# Altium PCB Alimentação v3.PcbDoc
Units mm, origin at the board's own origin, x right, y up, seen from the top; angles counter-clockwise.
Board outline 65.66 x 46.74 mm, 2 copper layers (Top Layer, Bottom Layer); 13 components, 8 nets, 26 pads, 0 vias.
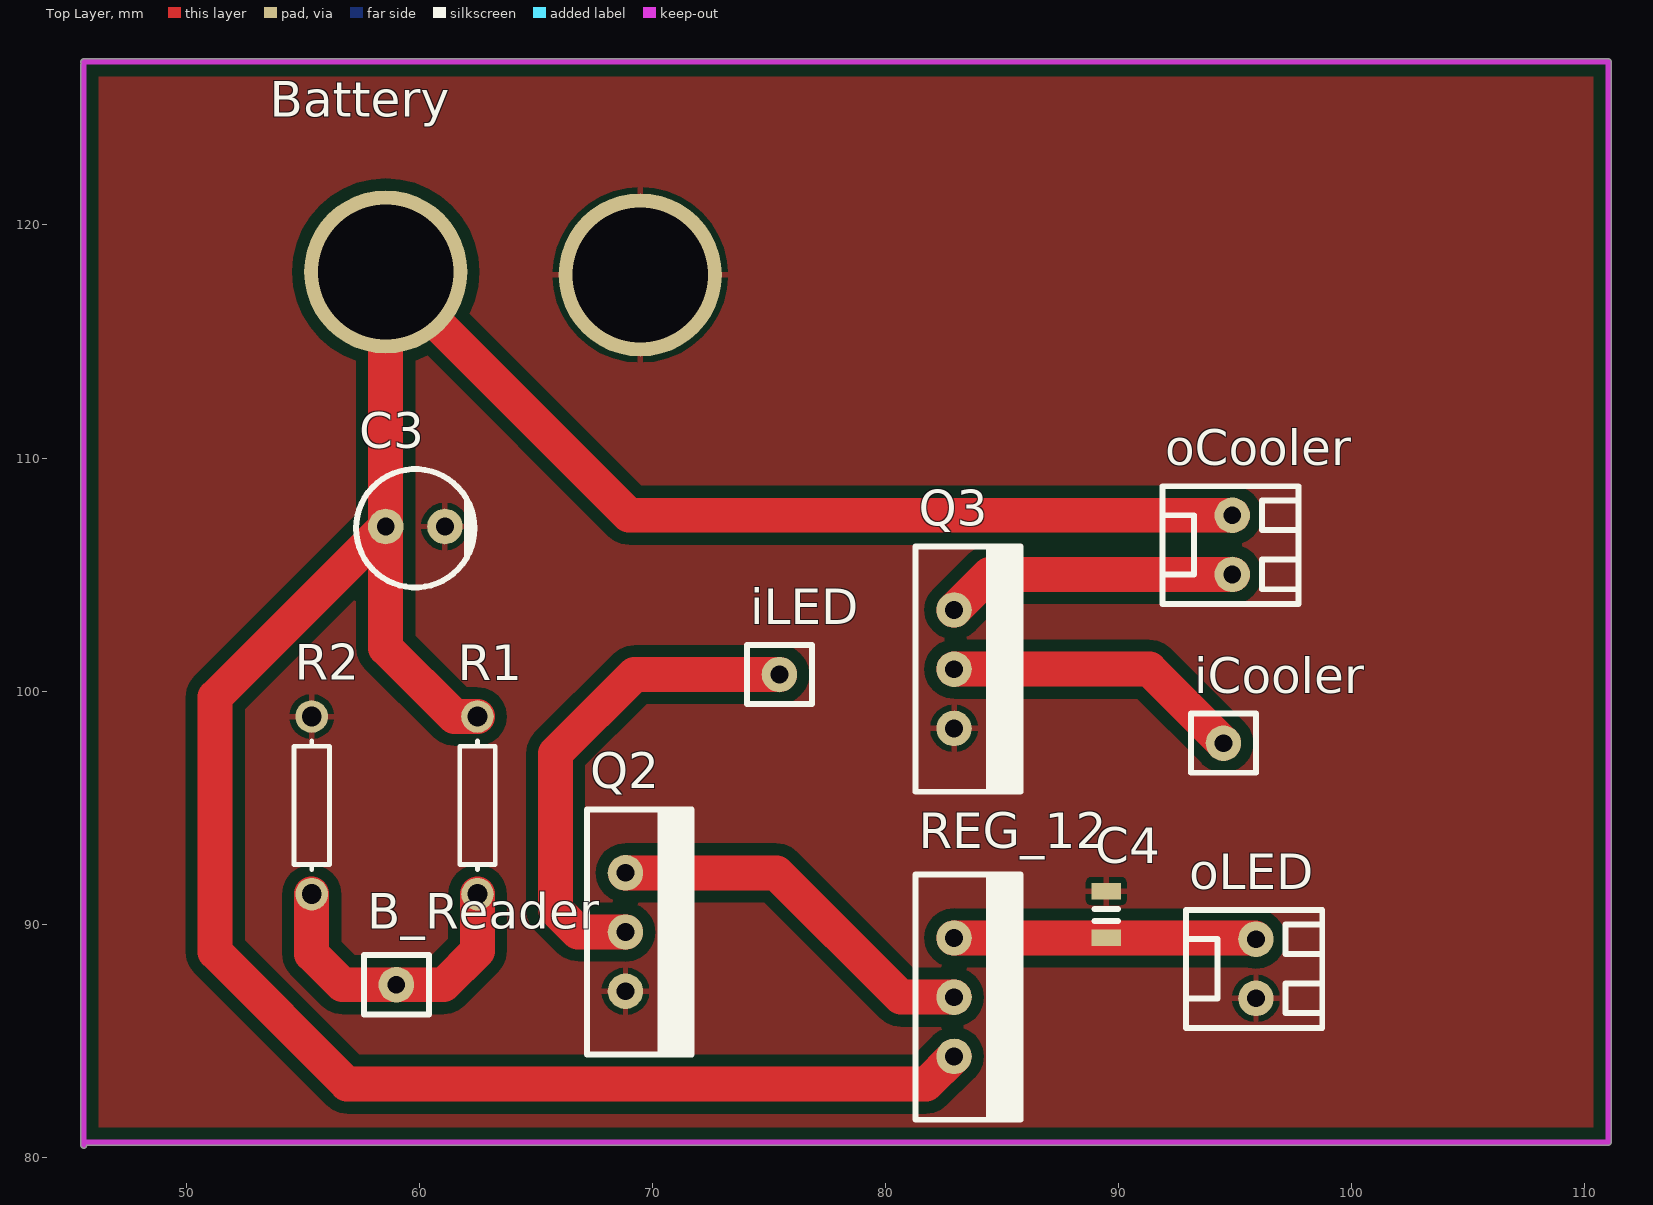
[diagram p0: Top Layer view]
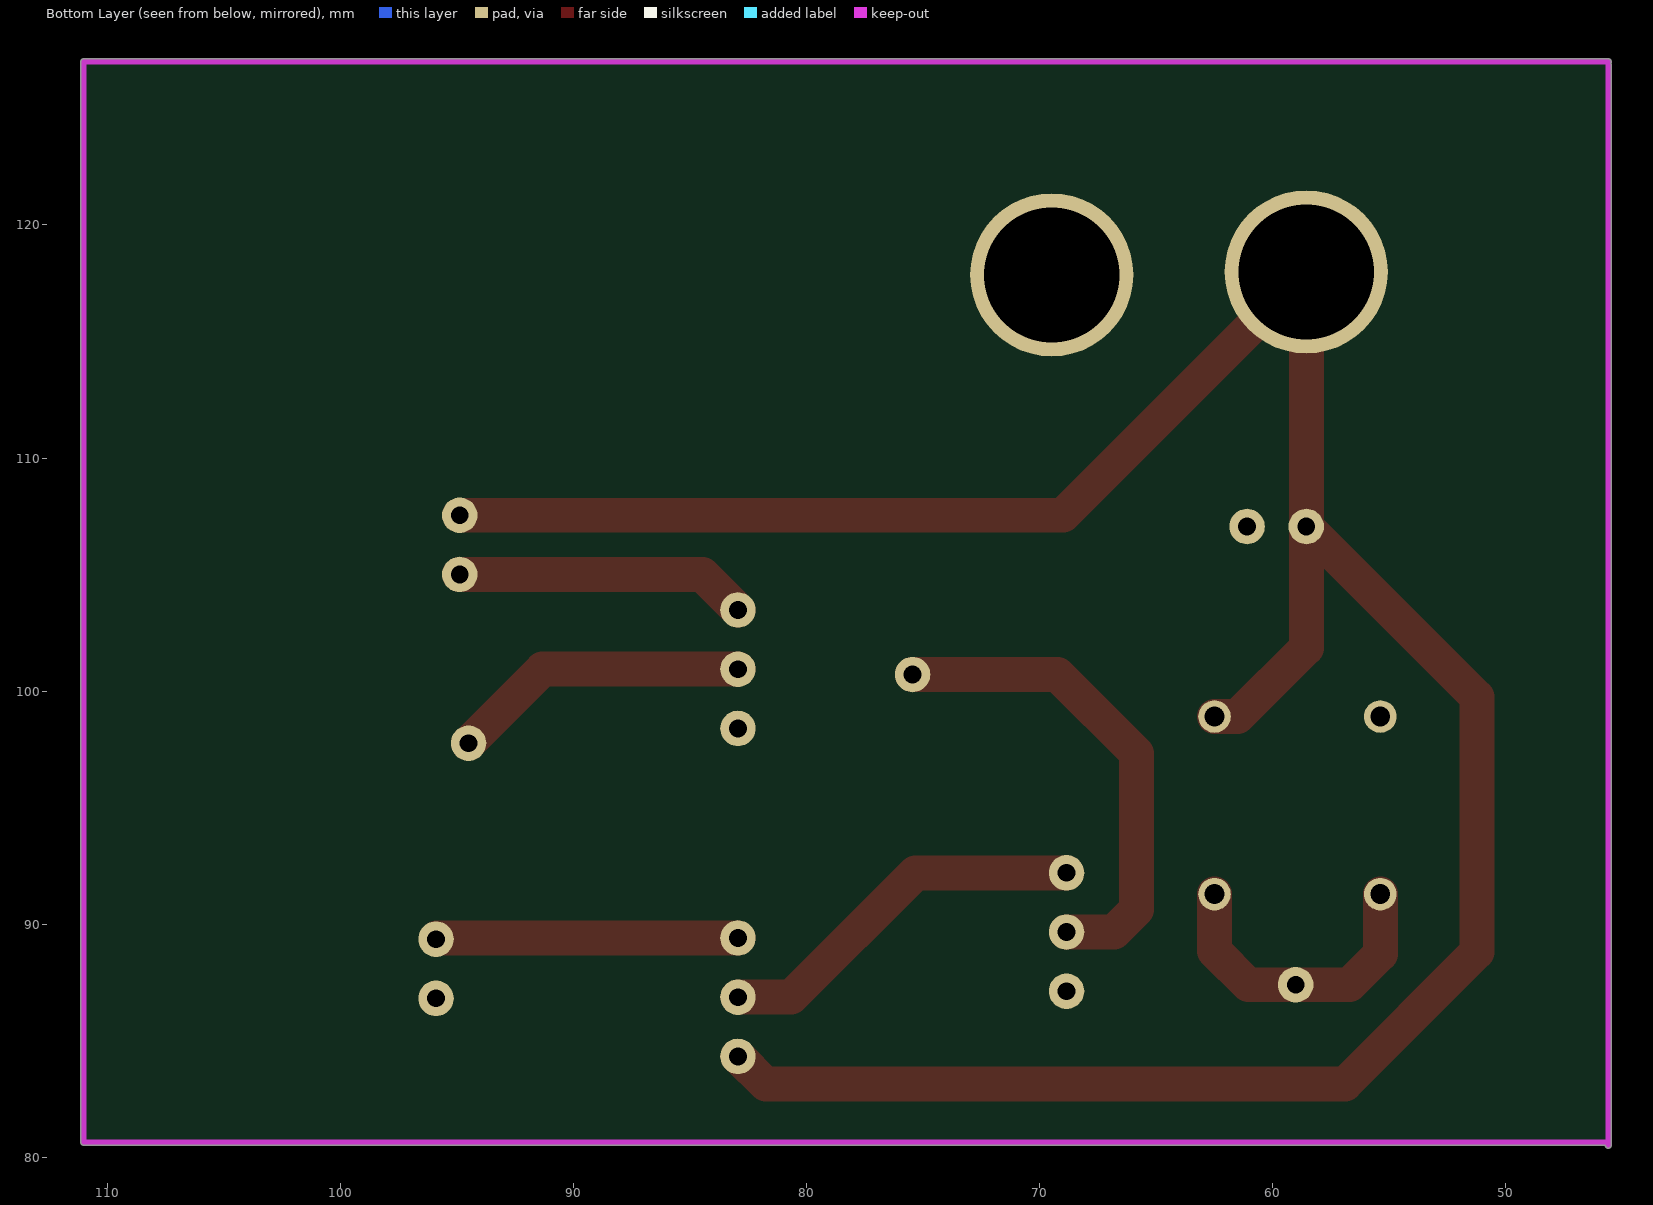
[diagram p1: Bottom Layer view, seen from below]
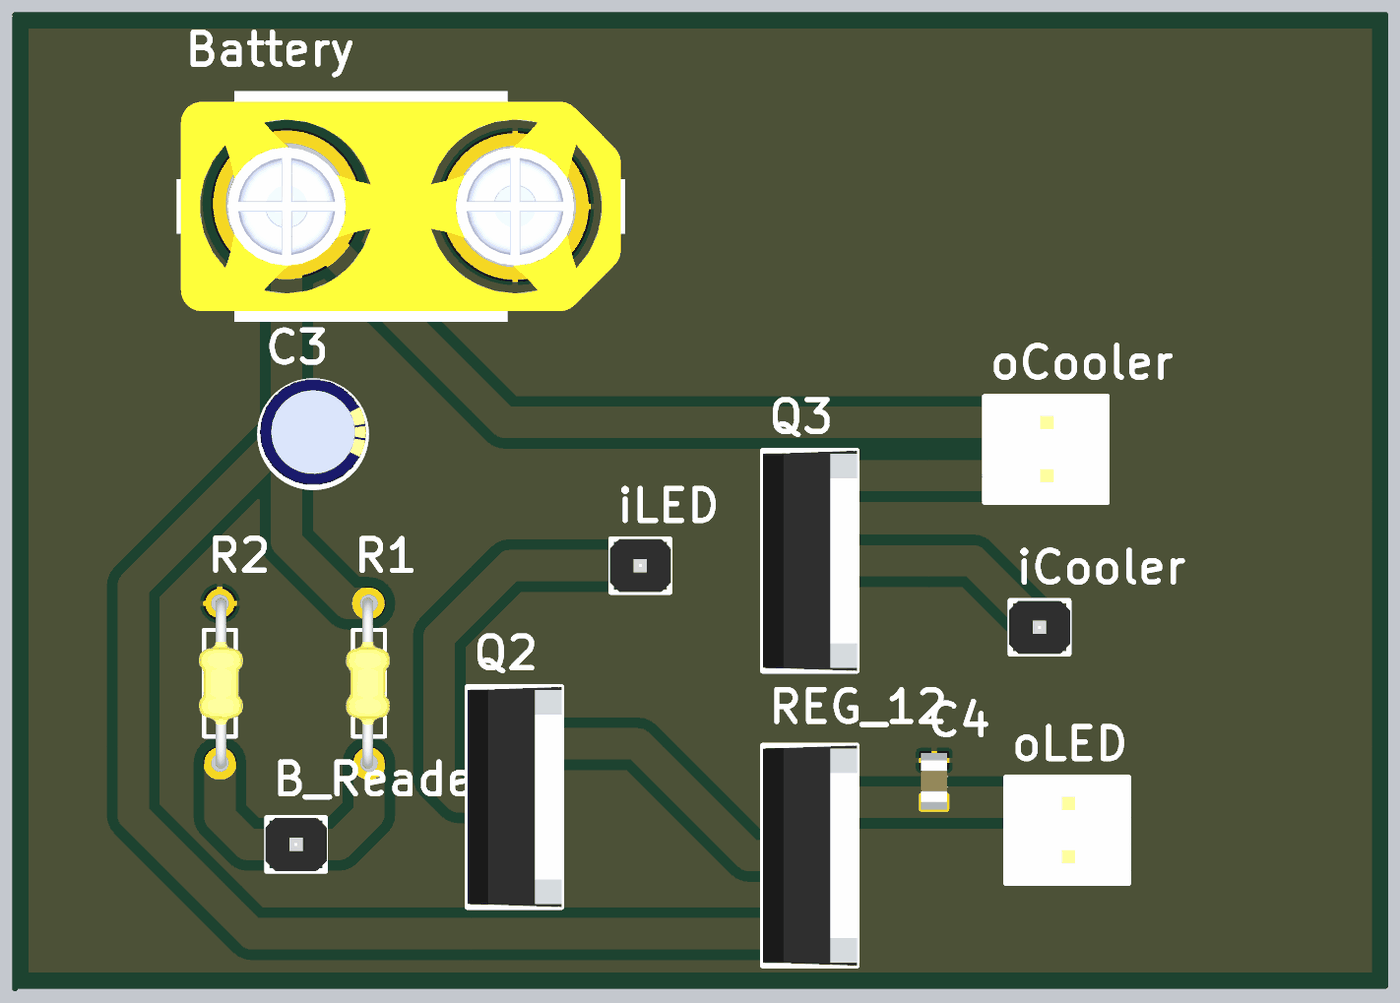
[diagram p2: 3D render of the assembled board from above, using the file's embedded part models]

## Layer stack, top to bottom
Top Solder: solder mask 0.0102, Solder Resist, Dk 3.5
Top Layer: signal copper 0.0356
Dielectric 1: dielectric 0.32, FR-4, Dk 4.8
Bottom Layer: signal copper 0.0356
Bottom Solder: solder mask 0.0102, Solder Resist, Dk 3.5

## Board outline
45.466,80.518 45.466,126.873 cw(c45.593,126.873) 45.483,126.936 cw(c45.593,127) 45.593,127.127 110.998,127.127 cw(c110.998,127) 111.125,127 111.125,80.645 cw(c110.998,80.645) 110.998,80.518 45.72,80.518 cw(c45.593,80.518)

## Design rules (kind name [scope] priority, off if disabled: settings)
Clearance [All] p1: gap=0.5 ignorepadtopadclearanceinfootprint=FALSE except(0: Arc-Hole Track-Hole SMDPad-Hole THPad-Hole Via-Hole Fill-Hole Poly-Hole Region-Hole Text-Hole)
PolygonConnect [All] p1: connectstyle=Relief reliefconductorwidth=0.254 reliefentries=4 polygonreliefangle="90 Angle" airgapwidth=0.254
RoutingVias [All] p1: holewidth=0.711 width=1.27 viastyle="Through Hole" minholewidth=0.711 minwidth=1.27 maxholewidth=0.711 maxwidth=1.27
SolderMaskExpansion [All] p1: expansion=0.102
Width [All] p1: maxlimit=1.5 minlimit=0.254 preferedwidth=1.5
30 further rules are at their usual default settings.

## Components (designator, comment, footprint, x,y, rotation, side; value= is the part's Value field where it differs from the comment)
B_Reader "*" "HEADER 1X1 8.5MM" 59.004,87.401 r90 top
Battery "*" XT90 58.547,117.983 r0 top
C3 "*" "Eletrolytic Capacitor 5x5mm" 58.547,107.061 r0 top
C4 "*" "SMD Capacitor" 89.459,91.415 r0 top
iCooler "*" "HEADER 1X1 8.5MM" 94.488,97.765 r90 top
iLED "*" "HEADER 1X1 8.5MM" 75.438,100.711 r90 top
oCooler "*" KK2 94.869,105.004 r90 top
oLED "*" KK2 95.885,86.817 r90 top
Q2 "Mosfet N" TO-220 68.834,87.122 r90 top
Q3 "Mosfet N" TO-220 82.931,98.4 r90 top
R1 "Resistor THT" "RESISTOR THT 5mm" 62.484,95.098 r90 top value=330K
R2 "Resistor THT" "RESISTOR THT 5mm" 55.372,95.098 r270 top value=90K
REG_12 "78XX TO-220" TO-220 82.931,84.328 r90 top

## Footprints (in the part's own frame and the unit in brackets; to place one, negate y for a bottom-side part, rotate by r counter-clockwise, add the part's x,y. Pads: shape width x height; smd on the part's side, far side on the other; paste and mask are expansions set on the pad)
"Eletrolytic Capacitor 5x5mm" [mil]
  round 60 hole 30: 1(0,0) 2(100,0)
  silkscreen extent -50,-103 150,97, body extent -50,-99 150,101, height 520
"HEADER 1X1 8.5MM" [mil] "Stackable 1 pin header"
  round 60 hole 30: 1(0,0)
  silkscreen extent -50,-55 50,55, body extent -50,-57 50,57, height 335
KK2 [mil] "KK Conector, 2 ways"
  round 60 hole 30: 1(0,0) 2(100,0)
  silkscreen extent -50,-112 149,118, body extent -50,-116 150,114, height 468
"RESISTOR THT 5mm" [mm]
  round 1.4 hole 0.85: 1(-3.81,0) 2(3.81,0)
  silkscreen extent -2.77,-0.76 2.77,0.76, body extent -4.07,-1 4.07,1.1, height 2.55
"SMD Capacitor" [mm]
  rect 1.25x0.7 smd: 1(0,0) 2(0,-2)
  silkscreen extent -0.51,-1.27 0.51,-0.76, body extent -0.63,-1.99 0.62,0.01, height 1
TO-220 [mil] "TO-220 coupling"
  round 60 hole 30: 1(0,0) 2(100,0) 3(200,0)
  silkscreen extent -107,-112 307,65, body extent -107,-112 307,65, height 810
XT90 [mm]
  round 7 hole 5.8 mask+0.102: 1(0,0)
  round 7 hole 5.8: 2(10.922,-0.127)
  body extent -5.24,-5.63 16.16,5.37, height 20.7

## Part data
B_Reader iCooler iLED: library part "Male Pin Head 1x1"
Battery: library part XT90
C3: library part "Electrolytic Capacitor 0.33uF"
C4: library part "Capacitor SMD 0805"
oCooler oLED: library part KK2, "KK Connector, 2 ways"
Q2 Q3: Model=IRF3205

## Nets (pads, with @x,y where several pads share a name; then routed paths per layer and width w, separated by ;. In a path a pad name is that pad's centre, name@x,y a point inside that pad or via, vN(x,y) a via of type N, cw(c..) or ccw(c..) an arc to the next point about the centre after c; other vN are vias at no path point)
B_Reader: B_Reader.1 R1.1 R2.2 | length 13.3
  Top Layer w1.5: R2.2 55.372,88.722 56.693,87.401 B_Reader.1 61.036,87.401 62.484,88.849 R1.1
C_Cooler: iCooler.1 Q3.2 | length 12.9
  Top Layer w1.5: Q3.2 91.313,100.94 iCooler.1
C_LED: iLED.1 Q2.2 | length 21.1
  Top Layer w1.5: Q2.2 66.802,89.662 65.837,90.627 65.837,97.333 69.215,100.711 iLED.1
C_out: oCooler.1 Q3.3 | length 12.6
  Top Layer w1.5: Q3.3 84.455,105.004 oCooler.1
GND: Battery.2 C3.2 C4.1 oLED.1 Q2.1 Q3.1 R2.1
LED: C4.2 oLED.2 REG_12.3 | length 12.9
  Top Layer w1.5: REG_12.3 oLED.2@95.834,89.408
NetQ2_3: Q2.3 REG_12.2 | length 16.3
  Top Layer w1.5: Q2.3 75.311,92.202 80.645,86.868 REG_12.2
VCC: Battery.1 C3.1 oCooler.2 R1.2 REG_12.1 | length 117.8
  Top Layer w1.5: R1.2 61.493,98.908 58.547,101.854 C3.1 ; REG_12.1 81.737,83.134 56.896,83.134 51.232,88.798 51.232,99.746 C3.1 ; oCooler.2 68.986,107.544 Battery.1 C3.1

## Polygon pours and split planes (outlines as drawn)
GND on Top Layer "GND" (solid, remove dead copper, pour order 0): 45.593,127 110.998,127 110.998,80.645 45.593,80.645

## Keep-outs
Keep-Out Layer:
  lines w0.254: 45.593,80.518 45.593,82.423 45.593,93.535 45.593,115.76 45.593,126.873 ; 45.593,80.645 110.998,80.645 110.998,127 45.593,127